# Altium PCB Stage1.PcbDoc
Units mil, origin at the board's own origin, x right, y up, seen from the top; angles counter-clockwise.
Board outline 5078.74 x 2175.2 mil, 4 copper layers (Top Layer, Top, Mid-Layer 1, Gnd, Mid-Layer 2, VCC, Bottom Layer, Bottom), stack 18.2 mil thick; 44 components, 32 nets, 168 pads, 37 vias.
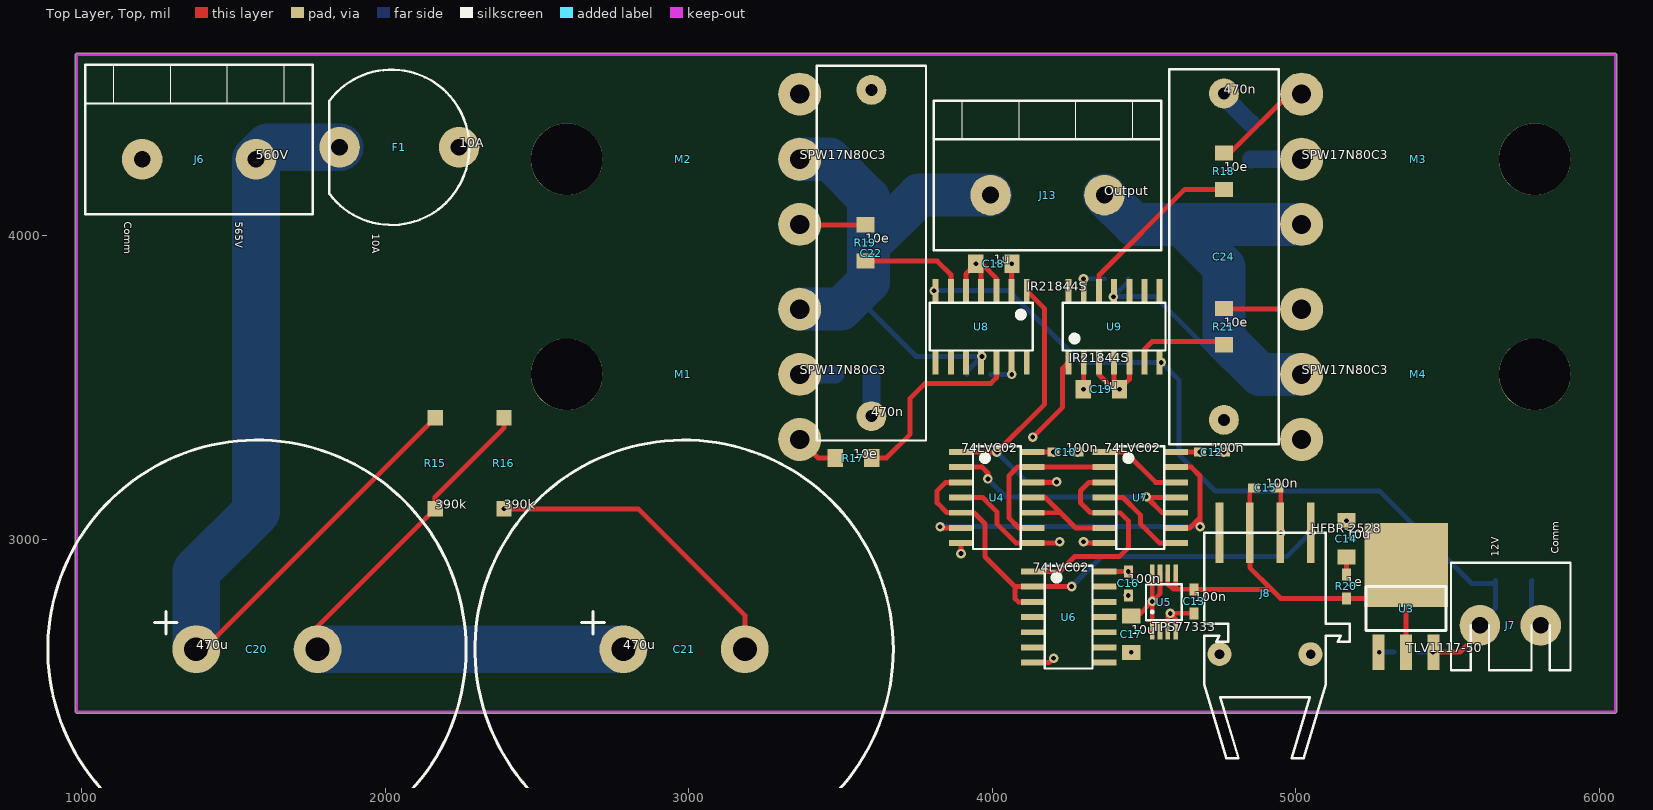
[diagram p0: Top Layer, Top view]
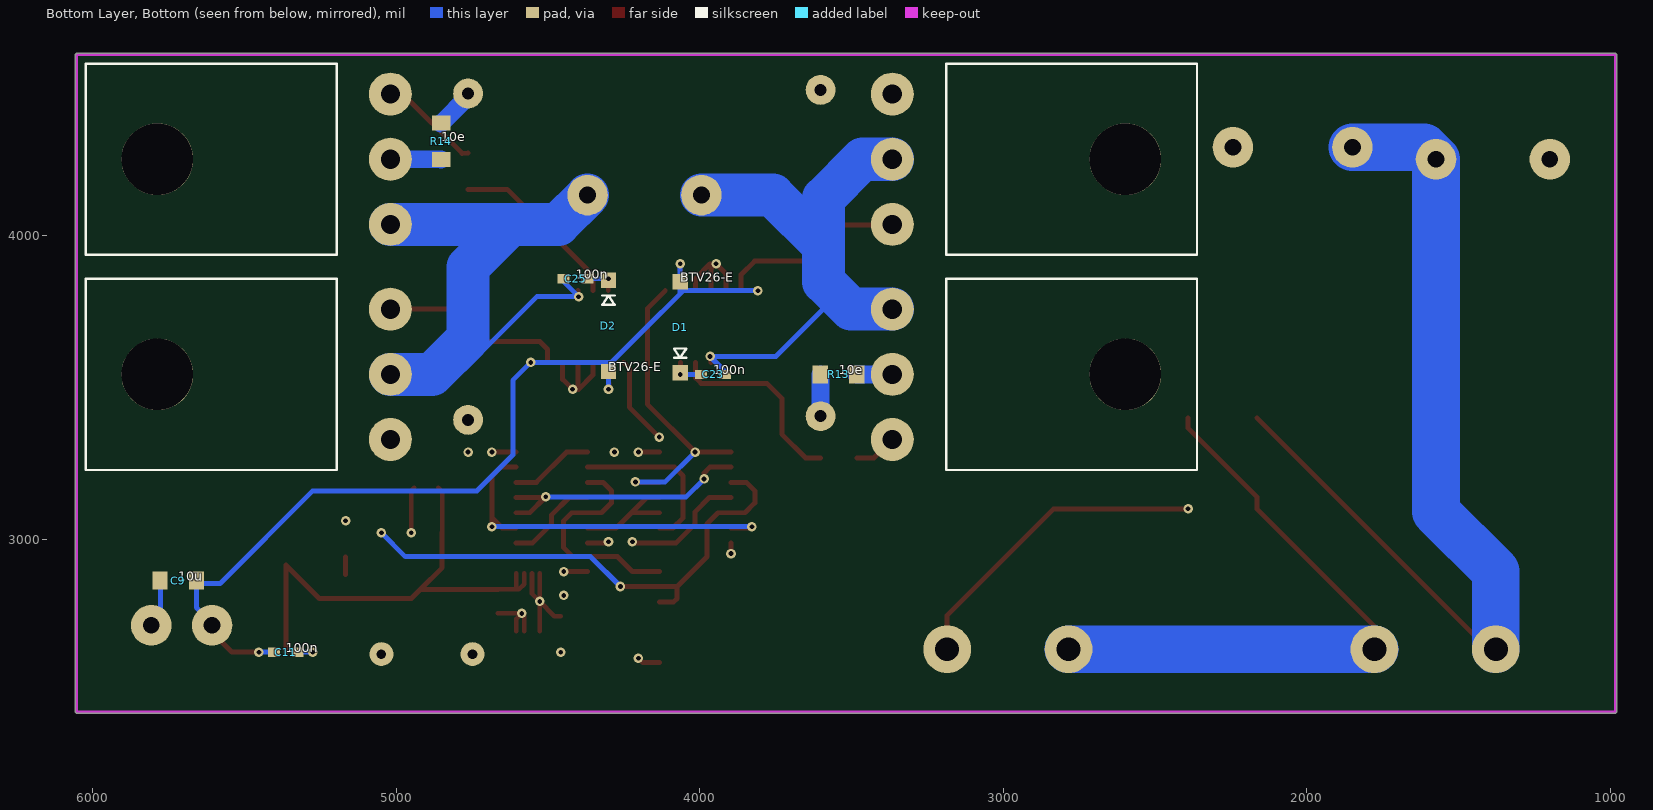
[diagram p1: Bottom Layer, Bottom view, seen from below]
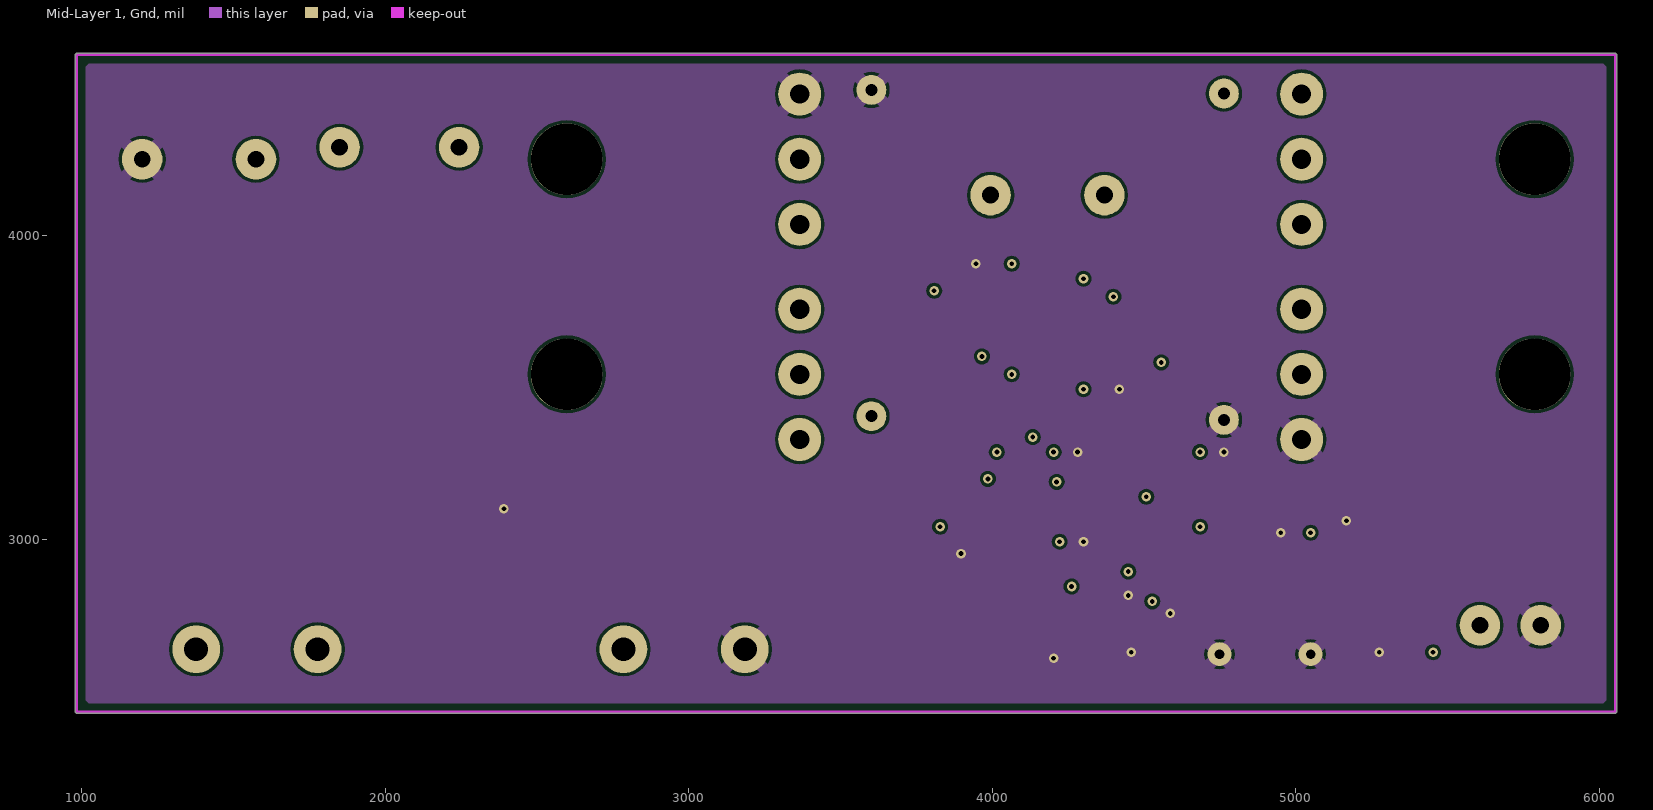
[diagram p2: Mid-Layer 1, Gnd]
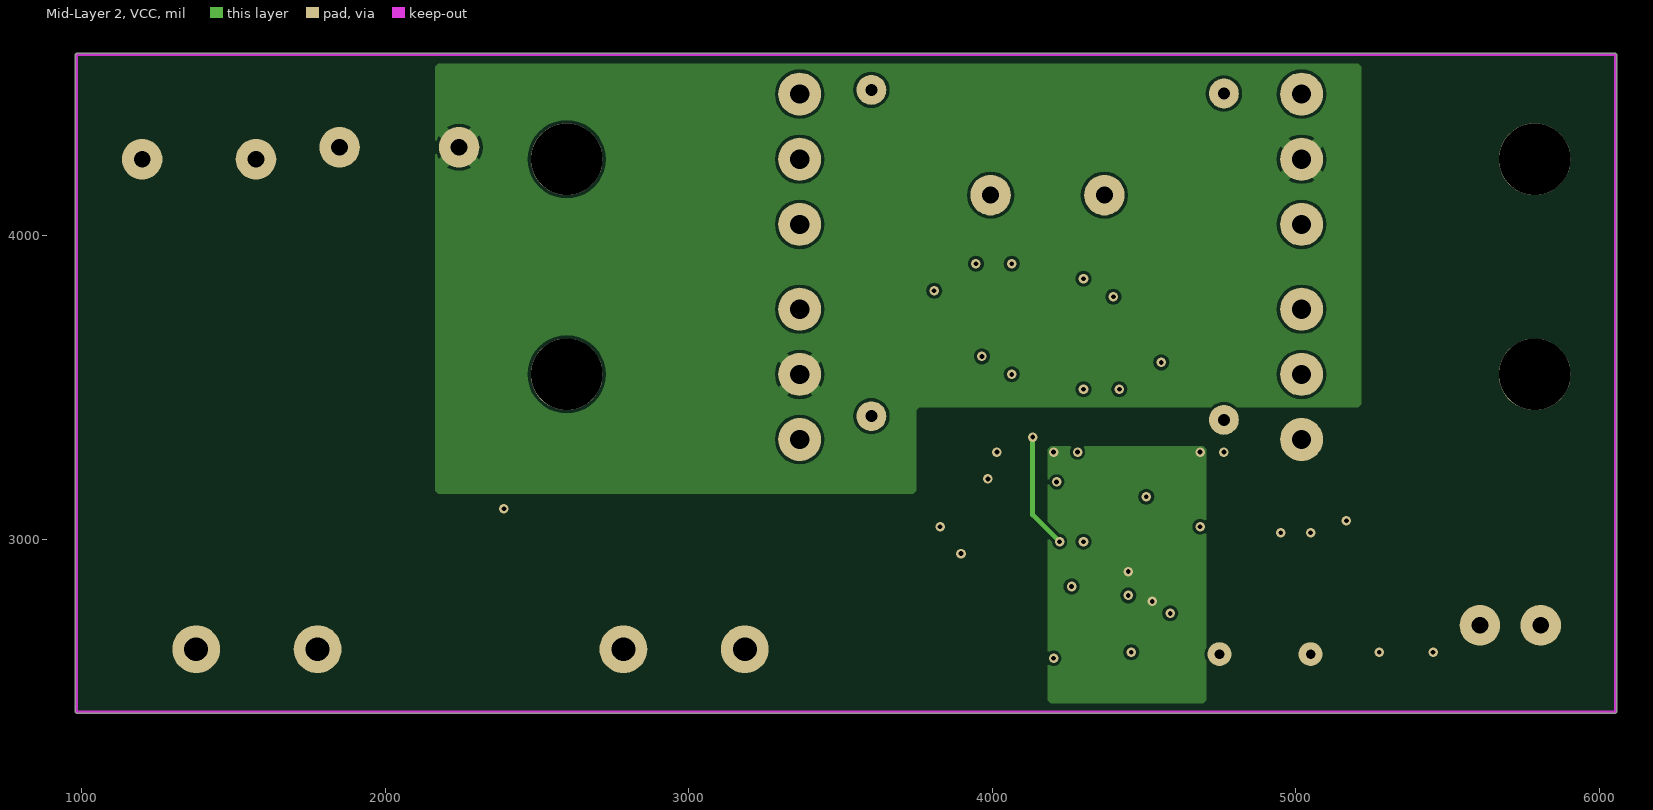
[diagram p3: Mid-Layer 2, VCC]

## Layer stack, top to bottom
Top Solder, Top Mask: solder mask 0.4, Solder Resist, Dk 3.5
Top Layer, Top: signal copper 1.4
Dielectric 1: dielectric 12.6, FR-4, Dk 4.8
Mid-Layer 1, Gnd: signal copper 1.4
Mid-Layer 2, VCC: signal copper 1.4
Bottom Layer, Bottom: signal copper 1.4
Bottom Solder, Bot Mask: solder mask 0.4, Solder Resist, Dk 3.5

## Board outline
979.33,2431.1 984.25,2426.18 6053.15,2426.18 6058.07,2431.1 6058.07,4596.46 6053.15,4601.38 984.25,4601.38 979.33,4596.46

## Design rules (kind name [scope] priority, off if disabled: settings)
Clearance [All] p1: gap=10 ignorepadtopadclearanceinfootprint=FALSE except(0: Arc-Hole Track-Hole SMDPad-Hole THPad-Hole Via-Hole Fill-Hole Poly-Hole Region-Hole Text-Hole; 5.91: Arc-Arc Arc-Track Arc-THPad Arc-Via Track-Track Track-THPad Track-Via THPad-THPad THPad-Via Via-Via)
PlaneClearance [All] p1: clearance=10
PolygonConnect PolygonConnect_6 [IsPolygon And InNet('565V') And OnLayer('Mid-Layer 2, VCC') vs IsVia] p1: connectstyle=Direct reliefconductorwidth=19.68 reliefentries=4 polygonreliefangle="90 Angle" airgapwidth=10
PolygonConnect PolygonConnect_5 [IsPolygon And InNet('565V') And OnLayer('Mid-Layer 2, VCC') vs IsPad] p2: connectstyle=Relief reliefconductorwidth=39.37 reliefentries=4 polygonreliefangle="45 Angle" airgapwidth=10
PolygonConnect PolygonConnect_4 [IsPolygon And InNet('3.3V_P') And OnLayer('Mid-Layer 2, VCC') vs IsVia] p3: connectstyle=Direct reliefconductorwidth=19.68 reliefentries=4 polygonreliefangle="90 Angle" airgapwidth=10
PolygonConnect PolygonConnect_3 [IsPolygon And InNet('3.3V_P') And OnLayer('Mid-Layer 2, VCC') vs IsPad] p4: connectstyle=Relief reliefconductorwidth=39.37 reliefentries=4 polygonreliefangle="45 Angle" airgapwidth=10
PolygonConnect PolygonConnect_2 [IsPolygon And InNet('GND_P') And OnLayer('Mid-Layer 1, Gnd') vs IsVia] p5: connectstyle=Direct reliefconductorwidth=19.68 reliefentries=4 polygonreliefangle="90 Angle" airgapwidth=10
PolygonConnect PolygonConnect_1 [IsPolygon And InNet('GND_P') And OnLayer('Mid-Layer 1, Gnd') vs IsPad] p6: connectstyle=Relief reliefconductorwidth=39.37 reliefentries=4 polygonreliefangle="45 Angle" airgapwidth=10
PolygonConnect [All] p7: connectstyle=Relief reliefconductorwidth=10 reliefentries=4 polygonreliefangle="90 Angle" airgapwidth=10
RoutingVias [All] p1: holewidth=28 width=50 viastyle="Through Hole" minholewidth=28 minwidth=50 maxholewidth=28 maxwidth=50
SolderMaskExpansion [All] p1: expansion=4
Width [All] p1: maxlimit=10 minlimit=10 preferedwidth=10
29 further rules are at their usual default settings.

## Components (designator, comment, footprint, x,y, rotation, side; value= is the part's Value field where it differs from the comment)
C9 "10u" 1206 5718.5,2864.17 r0 bottom
C10 "100n" 0603 4242.13,3287.4 r180 top
C11 "100n" 0603 5364.17,2627.95 r180 bottom
C12 "100n" 0603 4724.41,3287.4 r180 top
C13 "100n" 0603 4665.35,2795.28 r270 top
C14 "10u" 1206 5167.32,3001.97 r90 top
C15 "100n" 0603 4901.57,3169.29 r0 top
C16 "100n" 0603 4448.82,2854.33 r90 top
C17 "10u" 1206 4458.66,2687.01 r270 top
C18 "1u" 1206 4005.91,3907.48 r0 top
C19 "1u" 1206 4360.24,3494.09 r180 top
C20 "470u" C-35MM 1377.95,2637.8 r0 top
C21 "470u" C-35MM 2785.43,2637.8 r0 top
C22 "470n" C-HV 3602.36,3405.51 r90 top locked
C23 "100n" 0603 3956.69,3543.31 r180 bottom
C24 "470n" C-HV 4763.78,4468.5 r270 top locked
C25 "100n" 0603 4409.45,3858.27 r0 bottom
D1 "BTV26-E" D-THT 4064.96,3848.43 r270 bottom
D2 "BTV26-E" D-THT 4301.18,3553.15 r90 bottom
F1 "10A" FUSE 2244.09,4291.34 r180 top
J6 "560V" TERMINAL 1574.8,4251.97 r180 top
J7 "Power" TERM-2_TERM-2(Primary) 5807.09,2716.54 r180 top
J8 "HFBR-2528" HFBR 5049.21,3021.65 r270 top
J13 "Output" TERMINAL 4370.08,4133.86 r180 top locked
M1 "SPW17N80C3" TO-247 3366.14,3543.31 r90 top locked
M2 "SPW17N80C3" TO-247 3366.14,4251.97 r90 top locked
M3 "SPW17N80C3" TO-247 5019.69,4251.97 r270 top locked
M4 "SPW17N80C3" TO-247 5019.69,3543.31 r270 top locked
R13 "10e" 1206 3543.31,3543.31 r180 bottom
R14 "10e" 1206 4852.36,4311.02 r270 bottom
R15 "390k" R-THT 2165.35,3100.39 r90 top
R16 "390k" R-THT 2391.73,3100.39 r90 top
R17 "10e" 1206 3543.31,3267.72 r0 top
R18 "10e" 1206 4763.78,4212.6 r270 top
R19 "10e" 1206 3582.68,3976.38 r270 top
R20 "1e" 0603 5167.32,2844.49 r270 top
R21 "10e" 1206 4763.78,3700.79 r270 top
U3 "TLV1117-50" SOT-223 5364.17,2627.95 r0 top
U4 "74LVC02" SOIC-14 3897.64,3287.4 r0 top
U5 "TPS77333" MSOP-8 4527.56,2696.85 r90 top
U6 "74LVC02" SOIC-14 4133.86,2893.7 r0 top
U7 "74LVC02" SOIC-14 4370.08,3287.4 r0 top
U8 "IR21844S" SOIC-14 4114.17,3818.9 r270 top
U9 "IR21844S" SOIC-14 4251.97,3582.68 r90 top

## Footprints (in the part's own frame and the unit in brackets; to place one, negate y for a bottom-side part, rotate by r counter-clockwise, add the part's x,y. Pads: shape width x height; smd on the part's side, far side on the other; paste and mask are expansions set on the pad)
0603 [mm]
  rect 1x0.762 smd: 1(-1,0) 2(1,0)
1206 [mil]
  rect 50x60 smd: 1(-60,0) 2(60,0)
C-35MM [mm]
  round 4 hole 2: 1(0,0) 2(10.16,0)
  silkscreen extent -12.42,-17.5 22.58,17.5
C-HV [mm]
  round 2.5 hole 1: 1(0,0) 2(27.305,0)
  silkscreen extent -2.03,-4.57 29.34,4.57
D-THT [mil]
  rect 50x50 smd: 1(0,0) 2(300,0)
  silkscreen extent 220,-20 250,20
FUSE [mm]
  round 3.4 hole 1.4: 1(0,0) 2(10,0)
  silkscreen extent -0.85,-6.5 10.85,6.5
HFBR [mm]
  rect 5.08x0.635 smd: 1(0,0) 2(0,-2.54) 3(0,-5.08) 4(0,-7.62)
  round 2 hole 0.8: 5(10.16,-7.62) 6(10.16,0)
  silkscreen extent 0,-8.89 18.86,3.27
MSOP-8 [mm]
  rect 1.4x0.38 smd: 1(0,0) 2(0,-0.65) 3(0,-1.3) 4(0,-1.95) 5(4.875,-1.95) 6(4.875,-1.3) 7(4.875,-0.65) 8(4.875,0)
  silkscreen extent 0.94,-2.47 3.94,0.53
R-THT [mil]
  rect 50x50 smd: 1(0,0) 2(300,0)
SOIC-14 [mm]
  rect 2x0.5 smd: 1(0,0) 2(0,-1.27) 3(0,-2.54) 4(0,-3.81) 5(0,-5.08) 6(0,-6.35) 7(0,-7.62) 8(6,-7.62) 9(6,-6.35) 10(6,-5.08) 11(6,-3.81) 12(6,-2.54) 13(6,-1.27) 14(6,0)
  silkscreen extent 1,-8.11 5,0.49
SOT-223 [mm]
  rect 1x3 smd: 1(-2.3,0) 2(0,0) 3(2.3,0)
  rect 7x7 smd: 4(0,7.3)
  silkscreen extent -3.35,1.8 3.35,5.5
TERM-2_TERM-2(Primary) [mm]
  round 3.4 hole 1.4: 1(5.08,0) 2(0,0)
  silkscreen extent -2.5,-5.25 7.5,3.75
TERMINAL [mm]
  round 3.4 hole 1.4: 1(0,0) 2(9.525,0)
  silkscreen extent -4.76,-7.9 14.29,4.6
TO-247 [mm]
  round 3.6 hole 1.6: 1(-5.45,0) 2(0,0) 3(5.45,0)
  round 6 hole 6: 4(0,19.5)

## Via types
v1: diameter 31.5, hole 15.75, Top Layer, Top to Bottom Layer, Bottom, 37 vias

## Nets (pads, with @x,y where several pads share a name; then routed paths per layer and width w, separated by ;. In a path a pad name is that pad's centre, name@x,y a point inside that pad or via, vN(x,y) a via of type N, cw(c..) or ccw(c..) an arc to the next point about the centre after c; other vN are vias at no path point)
3.3V_P: C10.2 C12.2 C16.2 C17.1 U4.14 U5.1 U5.7 U5.8 U6.14 U7.14 | length 611.3
  Top Layer, Top w14.96: C17.1 4479.29,2747.01 v1(4527.56,2795.28) ; U5.1 v1(4527.56,2795.28) ; U5.8 v1(4527.56,2795.28) ; U5.7 4553.15,2820.87 v1(4527.56,2795.28)
  Top Layer, Top w16.38: U4.14 v1(4202.76,3287.4) ; U6.14 v1(4448.82,2893.7) ; U7.14 v1(4685.04,3287.4)
5V_P: C13.1 C15.1 J8.3 R20.2 U3.2 U3.4 U5.5 U5.6 | length 1601.7
  Top Layer, Top w14.96: U5.6 4578.74,2852.36 4596.46,2834.65 ; U5.5 4604.33,2842.52 4596.46,2834.65 ; C13.1 4596.46,2834.65 ; J8.3 4849.21,3156.3 C15.1
  Top Layer, Top w16.38: C13.1 4921.26,2834.65 ; J8.3 4849.21,2910.24 4849.21,2906.69 4921.26,2834.65 ; U3.2 U3.4 5253.94,2805.12 R20.2 4950.79,2805.12 4921.26,2834.65
12V_P: C9.1 C11.1 C18.2 C19.2 D1.1 D2.1 J7.1 U3.3 U8.2 U8.7 U9.2 U9.7 | length 3283.5
  Top Layer, Top w16.38: v1(3809.06,3818.9) U8.7 ; U8.2 4064.17,3887.01 C18.2@4064.96,3887.8 ; v1(4064.96,3907.48) C18.2@4064.96,3887.8 ; C18.2 4065.91,3888.74 C18.2@4064.96,3887.8 ; v1(4301.18,3494.09) C19.2 4300.24,3512.83 4301.97,3514.57 U9.2 ; U9.7 v1(4557.09,3582.68) ; v1(5452.76,2627.95) U3.3 5541.34,2627.95 5607.09,2693.7 J7.1
  Bottom Layer, Bottom w16.38: v1(3809.06,3818.9) 4055.12,3818.9 4064.96,3809.06 ; v1(4064.96,3907.48) 4064.96,3887.8 ; v1(4301.18,3494.09) 4301.18,3523.62 ; C11.1 v1(5452.76,2627.95) ; J7.1 5629.92,2746.06 5658.5,2774.65 C9.1@5658.5,2854.33 ; C9.1 C9.1@5658.5,2854.33 ; 4064.96,3809.06 4183.07,3690.94 4291.34,3582.68 ; 4064.96,3809.06 D1.1 ; D1.1 4064.96,3887.8 ; D1.1 4064.96,3887.8 ; 4291.34,3582.68 v1(4557.09,3582.68) 4616.14,3523.62 4616.14,3277.56 4734.25,3159.45 5275.59,3159.45 5580.71,2854.33 C9.1@5658.5,2854.33 ; 4291.34,3582.68 4301.18,3572.83 D2.1 ; 4301.18,3523.62 D2.1 ; 4301.18,3523.62 D2.1
565V: F1.1 M1.2 M3.2 R13.2 R14.2 | length 286.4
  Bottom Layer, Bottom w59.06: M1.2 R13.2 R13.2@3484.25,3543.31 ; R14.2 4852.36,4251.97 M3.2
DC_IN: C20.1 F1.2 J6.1 R15.2 | length 3090.9
  Top Layer, Top w16.38: C20.1 1402.76,2637.8 R15.2
  Bottom Layer, Bottom w157.48: C20.1 1377.95,2893.7 1574.8,3090.55 J6.1 1614.17,4291.34 F1.2
GND_P: C9.2 C10.1 C11.2 C12.1 C13.2 C14.2 C15.2 C16.1 C17.2 C18.1 C19.1 C21.2 C22.2 C24.2 J6.2 J7.2 J8.2 J8.5 J8.6 M2.3 M4.3 R16.1 U3.1 U4.7 U5.3 U5.4 U6.7 U7.7 U8.3 U8.4 U8.5 U9.3 U9.4 U9.5 | length 2452.8
  Top Layer, Top w14.96: C17.2 v1(4458.66,2627.95) ; U5.3 4578.74,2748.03 v1(4586.61,2755.91) ; U5.4 4604.33,2738.19 v1(4586.61,2755.91) ; C13.2 v1(4586.61,2755.91) ; C15.2 4950.79,3159.45 v1(4950.79,3021.65)
  Top Layer, Top w16.38: v1(2391.73,3100.39) 2834.65,3100.39 3185.43,2749.61 C21.2 ; v1(3897.64,2952.76) U4.7 ; U8.5 3914.17,3874.8 v1(3946.85,3907.48) ; C18.1 v1(3946.85,3907.48) ; U8.4 3964.17,3890.16 v1(3946.85,3907.48) ; U8.3 4014.17,3859.84 3966.54,3907.48 v1(3946.85,3907.48) ; U6.7 4188.19,2593.7 v1(4202.76,2608.27) ; v1(4301.18,2992.13) 4305.91,2987.4 U7.7 ; U9.3 4351.97,3541.73 C19.1@4399.61,3494.09 ; U9.4 4401.97,3496.46 C19.1@4399.61,3494.09 ; C19.1 v1(4419.29,3494.09) ; U9.5 4451.97,3526.77 v1(4419.29,3494.09) ; J8.2 v1(4950.79,3021.65) ; v1(5167.32,3061.02) C14.2 ; U3.1 v1(5275.59,2627.95) ; C19.1@4399.61,3494.09 v1(4419.29,3494.09)
  Bottom Layer, Bottom w16.38: v1(5275.59,2627.95) C11.2 ; C9.2 5777.56,2863.23 5777.56,2746.06 J7.2
  other v1: 4448.82,2814.96 4281.5,3287.4 4763.78,3287.4
NET00000: C20.2 C21.1 R15.1 R16.2 | length 2023
  Top Layer, Top w16.38: C20.2 1781.5,2687.01 1781.5,2716.54 R15.1 2165.35,3139.76 2391.73,3366.14 R16.2
  Bottom Layer, Bottom w157.48: C20.2 C21.1
NET00001: C14.1 R20.1 | length 58.1
  Top Layer, Top w16.38: R20.1 C14.1
NET00005: M3.1 R18.1 | length 336.7
  Top Layer, Top w16.38: R18.1 4783.46,4271.65 4978.35,4466.54 M3.1
NET00008: C25.1 D2.2 U9.13 | length 113.7
  Top Layer, Top w16.38: v1(4301.18,3858.27) 4301.97,3857.48 U9.13
  Bottom Layer, Bottom w16.38: D2.2 v1(4301.18,3858.27) C25.1
NET00011: R18.2 U9.12 | length 579.8
  Top Layer, Top w16.38: U9.12 4351.97,3869.68 4634.88,4152.6 R18.2
NET00014: R21.2 U9.6 | length 320.2
  Top Layer, Top w16.38: U9.6 4501.97,3625.98 4527.56,3651.57 4752.99,3651.57 R21.2
NET00019: M4.1 R21.1 | length 256.8
  Top Layer, Top w16.38: R21.1 4773.62,3759.84 4775.59,3757.87 M4.1
NET00031: U4.9 U4.13 U7.2 | length 557.9
  Top Layer, Top w16.38: U4.9 4088.58,3037.4 4055.12,3070.87 4055.12,3208.66 4083.86,3237.4 U4.13 4241.34,3237.4 4242.13,3238.19 4242.91,3237.4 U7.2
NET00032: U4.10 U4.11 U7.6 | length 369.4
  Top Layer, Top w16.38: U4.10 4225.59,3087.4 ; U4.11 4175.59,3137.4 4225.59,3087.4 ; U7.6 4275.59,3037.4 4225.59,3087.4
NET00036: U7.4 U7.8 | length 315.6
  Top Layer, Top w16.38: U7.4 4431.5,3137.4 4488.19,3080.71 4488.19,3051.18 4551.97,2987.4 U7.8
NET00039: U7.1 U7.12 | length 277.6
  Top Layer, Top w16.38: U7.1 4438.98,3287.4 4538.98,3187.4 U7.12
NET00040: U4.6 U7.9 U7.13 | length 1277.4
  Top Layer, Top w16.38: v1(3828.74,3041.34) 3832.68,3037.4 U4.6 ; U7.9 4651.57,3037.4 4685.04,3070.87 ; U7.13 4656.3,3237.4 4685.04,3208.66 4685.04,3070.87 ; v1(4685.04,3041.34) 4685.04,3070.87
  Bottom Layer, Bottom w16.38: v1(3828.74,3041.34) v1(4685.04,3041.34)
NET00041: U4.2 U7.10 U7.11 | length 878.4
  Top Layer, Top w16.38: U4.2 3967.32,3237.4 3986.22,3218.5 v1(3986.22,3198.82) ; v1(4507.87,3139.76) v1@4510.24,3137.4 ; U7.10 4560.24,3087.4 v1@4510.24,3137.4 ; U7.11 v1@4510.24,3137.4
  Bottom Layer, Bottom w16.38: v1(3986.22,3198.82) 4045.28,3139.76 v1(4507.87,3139.76)
NET00045: U6.1 U7.3 U7.5 | length 747.8
  Top Layer, Top w16.38: U6.1 4222.44,2893.7 4271.65,2942.91 4419.29,2942.91 4448.82,2972.44 4448.82,3061.02 4422.44,3087.4 U7.5 4324.02,3087.4 4291.34,3120.08 4291.34,3159.45 4319.29,3187.4 U7.3
NET00047: J8.1 U4.3 U4.5 U6.2 U6.3 | length 1714.8
  Top Layer, Top w16.38: U4.3 3846.85,3187.4 3818.9,3159.45 3818.9,3120.08 3851.57,3087.4 U4.5 3940.16,3087.4 3976.38,3051.18 3976.38,2942.91 4074.8,2844.49 ; U6.3 4086.22,2793.7 4074.8,2805.12 4074.8,2844.49 ; v1(4261.81,2844.49) 4261.02,2843.7 U6.2 4075.59,2843.7 4074.8,2844.49
  Bottom Layer, Bottom w16.38: v1(4261.81,2844.49) 4360.24,2942.91 4970.47,2942.91 v1(5049.21,3021.65)
NET00049: C22.1 R13.1 | length 138.7
  Bottom Layer, Bottom w59.06: C22.1 3602.36,3543.31 R13.1
NET00050: C24.1 R14.1 | length 136.1
  Bottom Layer, Bottom w59.06: C24.1 4763.78,4458.66 4852.36,4370.08 R14.1
NET00068: M1.1 R17.1 | length 142.4
  Top Layer, Top w16.38: M1.1 3427.17,3267.72 R17.1
NET00069: M2.1 R19.1 | length 218.3
  Top Layer, Top w16.38: M2.1 3368.11,4035.43 3582.68,4035.43 R19.1
NET00070: R17.2 U8.12 | length 640.3
  Top Layer, Top w16.38: R17.2 3651.57,3267.72 3730.32,3346.46 3730.32,3464.57 3779.53,3513.78 3996.06,3513.78 4014.17,3531.89 U8.12
NET00071: R19.2 U8.6 | length 353
  Top Layer, Top w16.38: R19.2 3819.84,3916.38 3864.17,3872.05 U8.6
NET00072: C23.1 D1.2 U8.13 | length 113.7
  Top Layer, Top w16.38: U8.13 4064.17,3544.09 v1(4064.96,3543.31)
  Bottom Layer, Bottom w16.38: C23.1 v1(4064.96,3543.31) D1.2
OUT1: C23.2 J13.2 M1.3 M2.2 U8.11 | length 2054.8
  Top Layer, Top w16.38: U8.11 v1(3966.54,3602.36)
  Bottom Layer, Bottom w16.38: M1.3 3501.97,3757.87 3594.49,3757.87 3750,3602.36 v1(3966.54,3602.36) 3917.32,3553.15 C23.2
  Bottom Layer, Bottom w141.73: M1.3 3501.97,3757.87 3592.52,3848.43 3592.52,3966.54 ; M2.2 3464.57,4251.97 3592.52,4124.02 3592.52,3966.54 ; J13.2 3759.84,4133.86 3592.52,3966.54
OUT2: C25.2 J13.1 M3.3 M4.2 U9.11 | length 2253.6
  Top Layer, Top w16.38: v1(4399.61,3799.21) U9.11
  Bottom Layer, Bottom w16.38: C25.2 4448.82,3848.43 v1(4399.61,3799.21) 4537.4,3799.21 4793.31,3543.31 4881.89,3543.31 M4.2
  Bottom Layer, Bottom w141.73: J13.1 4466.54,4037.4 4624.02,4037.4 ; M4.2 4881.89,3543.31 4763.78,3661.42 4763.78,3897.64 4624.02,4037.4 ; M3.3 4903.54,4037.4 4624.02,4037.4
S1: U4.1 U4.12 U8.1 | length 1056.3
  Top Layer, Top w16.38: U4.1 v1(4015.75,3287.4) 4173.23,3444.88 4173.23,3759.84 U8.1 ; U4.12 4211.02,3187.4 v1(4212.6,3188.98)
  Bottom Layer, Bottom w16.38: v1(4015.75,3287.4) 4114.17,3188.98 v1(4212.6,3188.98)
S2: U4.4 U4.8 U9.1 | length 1088.1
  Top Layer, Top w16.38: U4.4 3968.9,3137.4 4015.75,3090.55 4015.75,3051.18 4079.53,2987.4 U4.8 4217.72,2987.4 v1(4222.44,2992.13) ; v1(4133.86,3336.61) 4232.28,3435.04 4232.28,3562.99 U9.1
  Mid-Layer 2, VCC w16.38: v1(4133.86,3336.61) 4133.86,3080.71 v1(4222.44,2992.13)
pads on no net: J8.4 M1.4 M2.4 M3.4 M4.4 U5.2 U6.4 U6.5 U6.6 U6.8 U6.9 U6.10 U6.11 U6.12 U6.13 U8.8 U8.9 U8.10 U8.14 U9.8 U9.9 U9.10 U9.14

## Polygon pours and split planes (outlines as drawn)
GND_P on Mid-Layer 1, Gnd (solid, remove dead copper, pour order 0): 6023.62,4557.09 6013.78,4566.93 1023.62,4566.93 1013.78,4557.09 1013.78,2470.47 1023.62,2460.63 6013.78,2460.63 6023.62,2470.47
565V on Mid-Layer 2, VCC (solid, remove dead copper, pour order 4): 2165.35,4035.43 2165.35,3159.45 2175.2,3149.61 3740.16,3149.61 3750,3159.45 3750,3425.2 3759.84,3435.04 5206.69,3435.04 5216.54,3444.88 5216.54,3838.58 5216.54,4557.09 5206.69,4566.93 2175.2,4566.93 2165.35,4557.09
3.3V_P on Mid-Layer 2, VCC (solid, remove dead copper, pour order 2): 4192.91,3307.09 4183.07,3297.24 4183.07,2470.47 4192.91,2460.63 4694.88,2460.63 4704.72,2470.47 4704.72,3297.24 4694.88,3307.09

## Keep-outs
Keep-Out Layer, Board:
  lines w9.84: 984.25,2431.1 6053.15,2431.1 6053.15,4596.46 984.25,4596.46 984.25,2431.1

## Silkscreen, mask and mechanical layers (free items; w line width, h text height)
Top Overlay, Top Silk:
  text "Comm" at 1141.73,4045.28 h24.61 r270
  text "565V" at 1505.91,4045.28 h24.61 r270
  text "10A" at 1958.66,4005.91 h24.61 r270
  text "Comm" at 5866.14,2952.76 h24.61 r90
  text "12V" at 5669.29,2942.91 h24.61 r90